# EAGLE board kitcop4 (EAGLE 6.1)
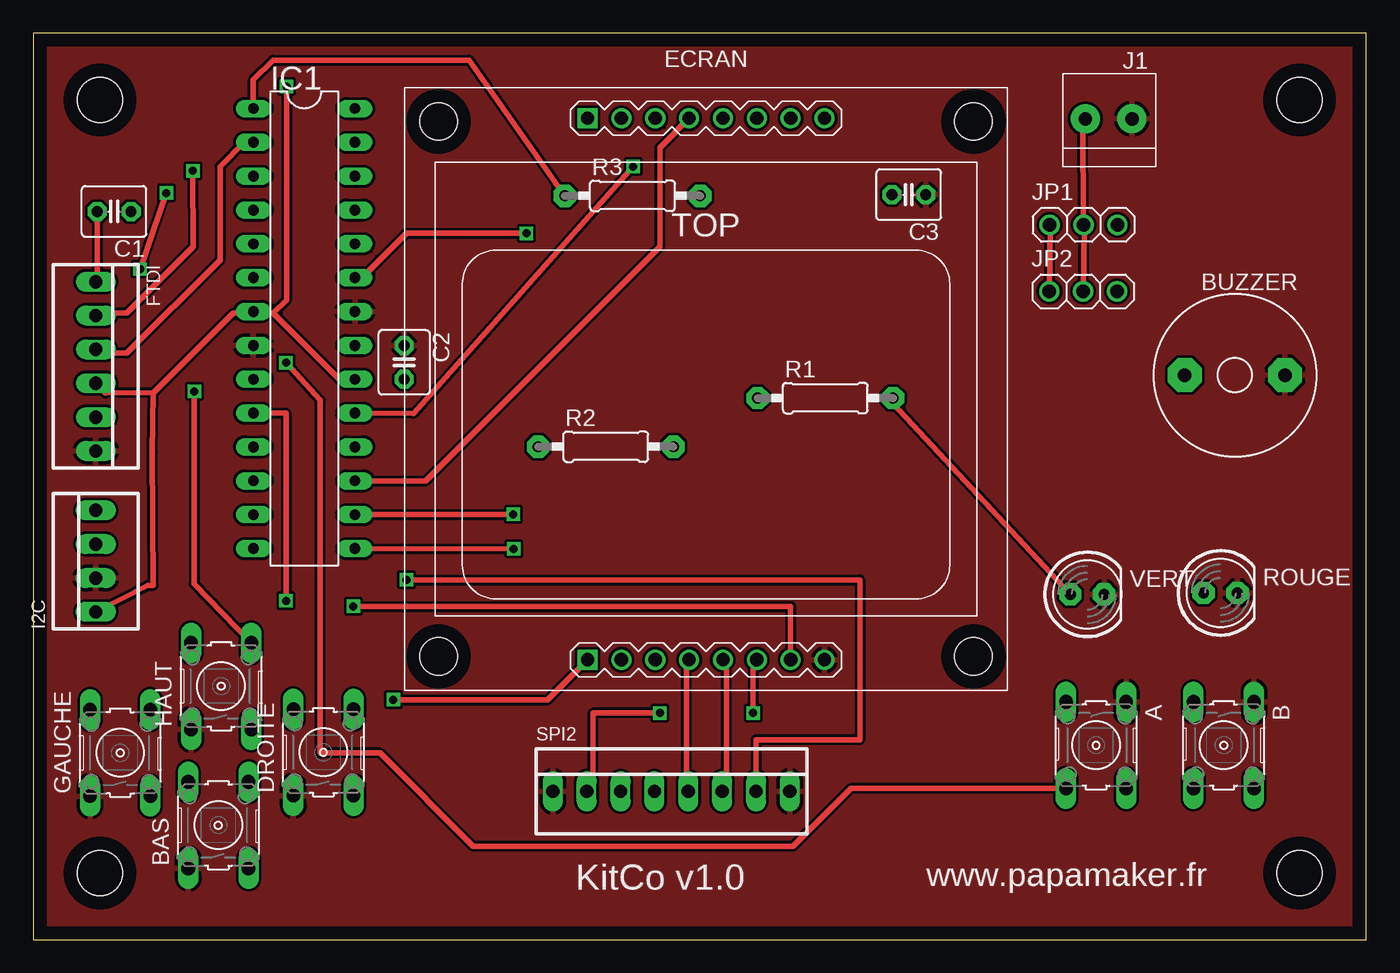
[diagram p0: board, top side]
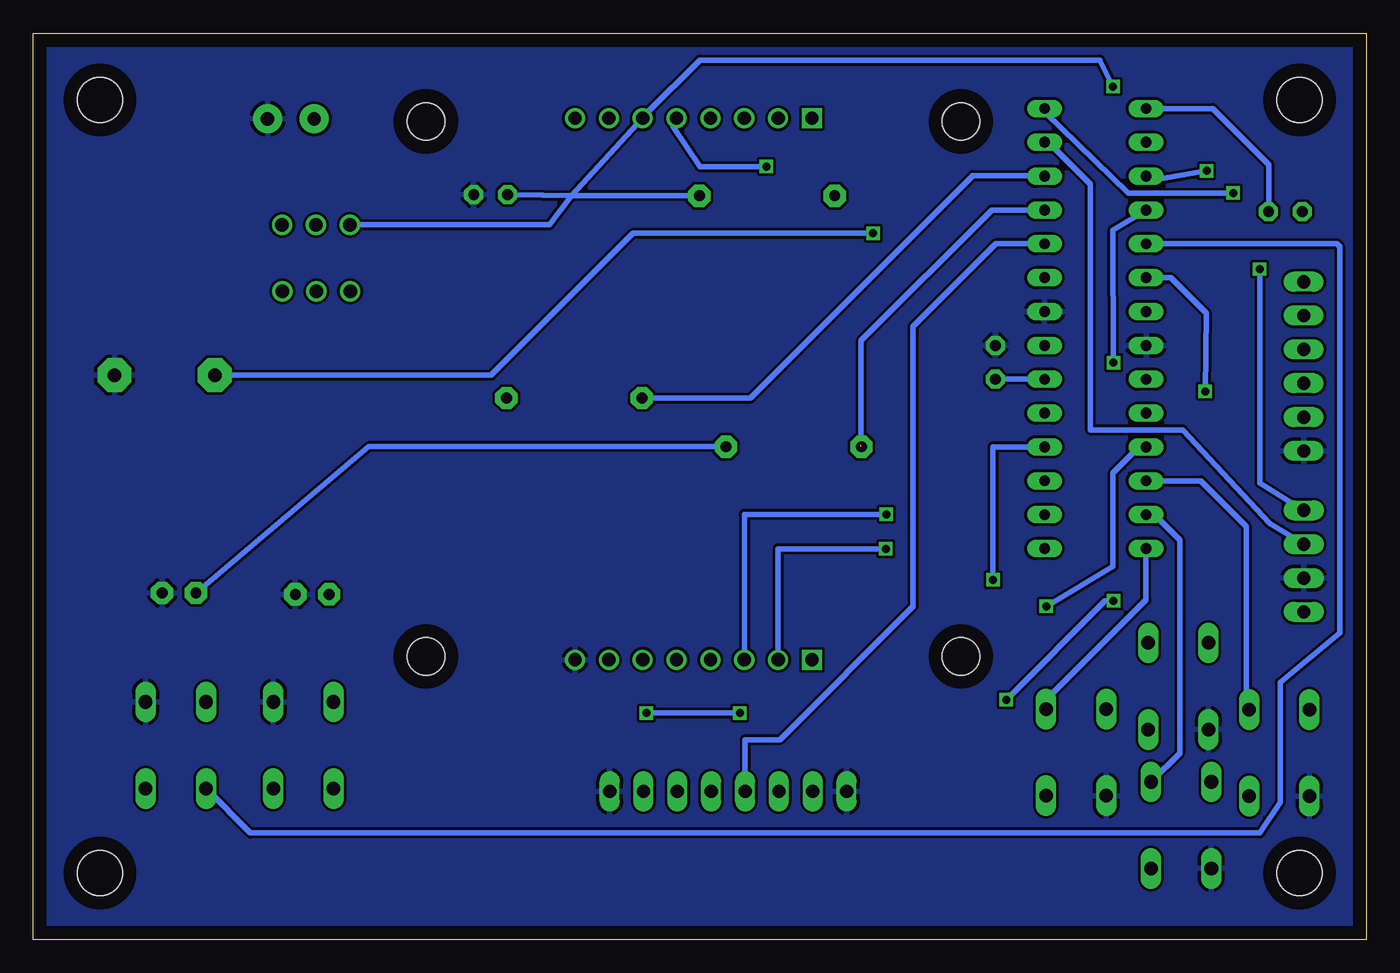
[diagram p1: board, bottom side, seen from below]

Size 100 x 68 mm. Coordinates in mm from the lower left corner, seen from the top.
Outline: 0,0 100,0 100,68 0,68 0,0
Copper layers (1*16): Top 0.035mm / dielectric 1.5mm / Bottom 0.035mm
Design rules: minimum track width 10mil, minimum drill 24mil, track to track 8mil, track to pad 8mil, pad to pad 8mil, via to via 8mil, smd to smd 8mil, copper to edge 40mil, drill to drill 8mil, minimum pad ring 10mil, minimum via ring 8mil, stop-mask expansion 4mil, vias tented up to drill 0mil, thermal gap 10mil
Holes 3.4 mm at 95,63 95,5 5,5 5,63

## Footprints (pad centres in the part's own frame; a part is rotated, then mirrored left to right if it is on the bottom)
B3F-10XX = drill 1.016 long: 1 -3.251,2.261; 2 3.251,2.261; 3 -3.251,-2.261; 4 3.251,-2.261
AL60P = drill 1.016 pad 2.54 octagon: 1 -3.759,0; 2 3.759,0
C025-040X050 = drill 0.813 pad 1.422 octagon: 1 -1.27,0; 2 1.27,0
DISPLAY-NOKIA-3310 = drill 1 square: J1.1 -8.89,-20.32; J2.1 -8.89,20.32 | drill 1: J1.2 -6.35,-20.32; J1.3 -3.81,-20.32; J1.4 -1.27,-20.32; J1.5 1.27,-20.32; J1.6 3.81,-20.32; J1.7 6.35,-20.32; J1.8 8.89,-20.32; J2.2 -6.35,20.32; J2.3 -3.81,20.32; J2.4 -1.27,20.32; J2.5 1.27,20.32; J2.6 3.81,20.32; J2.7 6.35,20.32; J2.8 8.89,20.32 | hole 2.8: -20.066,-20.066; 20.066,-20.066; 20.066,20.066; -20.066,20.066
22-23-2061 = drill 1 long: 1 -6.35,0; 2 -3.81,0; 3 -1.27,0; 4 1.27,0; 5 3.81,0; 6 6.35,0
22-23-2041 = drill 1 long: 1 -3.81,0; 2 -1.27,0; 3 1.27,0; 4 3.81,0
DIL28-3 = drill 0.813 long: 1 -16.51,-3.81; 2 -13.97,-3.81; 3 -11.43,-3.81; 4 -8.89,-3.81; 5 -6.35,-3.81; 6 -3.81,-3.81; 7 -1.27,-3.81; 8 1.27,-3.81; 9 3.81,-3.81; 10 6.35,-3.81; 11 8.89,-3.81; 12 11.43,-3.81; 13 13.97,-3.81; 14 16.51,-3.81; 15 16.51,3.81; 16 13.97,3.81; 17 11.43,3.81; 18 8.89,3.81; 19 6.35,3.81; 20 3.81,3.81; 21 1.27,3.81; 22 -1.27,3.81; 23 -3.81,3.81; 24 -6.35,3.81; 25 -8.89,3.81; 26 -11.43,3.81; 27 -13.97,3.81; 28 -16.51,3.81
1X2-3.5MM = drill 1 pad 2.184: 1 1.8,0; 2 -1.7,0
1X03 = drill 1.016: 1 -2.54,0; 2 0,0; 3 2.54,0
0207/10 = drill 0.813 pad 1.676 octagon: 1 -5.08,0; 2 5.08,0
LED5MM = drill 0.813 pad 1.676 octagon: A -1.27,0; K 1.27,0
22-23-2081 = drill 1 long: 1 -8.89,0; 2 -6.35,0; 3 -3.81,0; 4 -1.27,0; 5 1.27,0; 6 3.81,0; 7 6.35,0; 8 8.89,0

## Placement (x,y rotation side)
A  [B3F-10XX]  79.74,14.58 270 top
B  [B3F-10XX]  89.31,14.58 270 top
BAS  [B3F-10XX]  13.88,8.58 90 top
BUZZER  [AL60P]  90.15,42.35 0 top
C1  [C025-040X050]  6.06,54.63 180 top
C2  [C025-040X050]  27.82,43.31 270 top
C3  [C025-040X050]  65.68,55.89 180 top
DROITE  [B3F-10XX]  21.76,14.05 90 top
ECRAN  [DISPLAY-NOKIA-3310]  50.47,41.31 0 top
FTDI  [22-23-2061]  4.69,43.01 270 top
GAUCHE  [B3F-10XX]  6.52,14.01 90 top
HAUT  [B3F-10XX]  14.09,19.01 90 top
I2C  [22-23-2041]  4.69,28.39 90 top
IC1  ATMEGA328P-PU  [DIL28-3]  20.32,45.85 270 top
J1  1X2-3.5MM  [1X2-3.5MM]  80.63,61.58 0 top
JP1  [1X03]  78.8,53.63 0 top
JP2  [1X03]  78.77,48.63 0 top
R1  [0207/10]  59.42,40.63 0 top
R2  [0207/10]  42.95,36.98 0 top
R3  [0207/10]  44.95,55.81 0 top
ROUGE  [LED5MM]  89.07,26.01 0 top
SPI2  [22-23-2081]  47.87,11.12 0 top
VERT  [LED5MM]  79.07,25.9 0 top

## Library data of the parts
A B BAS DROITE GAUCHE HAUT = switch-omron; MPN: B3F-1000; OC_FARNELL: 176432; OC_NEWARK: 36M3542
BUZZER C1-C3 IC1 J1 JP1 JP2 R1-R3 ROUGE VERT = adafruit
ECRAN = FJlib
FTDI = con-molex; MF: MOLEX; MPN: 22-23-2061; OC_FARNELL: 1462922; OC_NEWARK: 27C1933
I2C = con-molex; MF: MOLEX; MPN: 22-23-2041; OC_FARNELL: 1462920; OC_NEWARK: 38C0355
SPI2 = con-molex; MF: MOLEX; MPN: 22-23-2081; OC_FARNELL: 1756826; OC_NEWARK: 01C7592

## Nets
_CE.2: ECRAN.J2.2
_RST.2: ECRAN.J2.1
GND: A.1 B.1 BAS.1 BUZZER.2 C2.1 C3.1 DROITE.1 ECRAN.J1.8 FTDI.6 GAUCHE.1 HAUT.1 I2C.2 IC1.8 IC1.22 J1.1 ROUGE.K SPI2.1 SPI2.8 VERT.K
N$1: A.4 IC1.4
N$2: B.4 IC1.5
N$3: ECRAN.J1.7 IC1.11
N$4: GAUCHE.4 IC1.12
N$5: BAS.4 IC1.13
N$6: DROITE.4 IC1.14
N$7: I2C.3 IC1.27
N$8: I2C.4 IC1.28
N$9: J1.2 JP1.2 JP2.2
N$10: HAUT.4 IC1.6
N$11: FTDI.2 IC1.3
N$12: IC1.26 R1.1
N$13: R1.2 VERT.A
N$14: IC1.25 R2.1
N$15: R2.2 ROUGE.A
N$16: IC1.24 SPI2.4
N$17: ECRAN.J2.4 IC1.17
N$18: ECRAN.J2.5 IC1.19
N$19: ECRAN.J1.2 IC1.15
N$20: ECRAN.J1.3 IC1.16
N$21: FTDI.3 IC1.2
N$22: IC1.18 SPI2.7
N$23: BUZZER.1 IC1.23
N$24: ECRAN.J1.4 SPI2.5
N$25: C1.2 FTDI.1
N$26: ECRAN.J1.5 SPI2.6
N$27: ECRAN.J1.6 SPI2.2
N$29: C1.1 IC1.1 R3.1
N$30: ECRAN.J1.1 IC1.10
VCC: C2.2 C3.2 ECRAN.J2.6 FTDI.4 I2C.1 IC1.7 IC1.20 JP1.1 JP2.1 R3.2

## Tracks (layer width: path | path; a pad name or v marks a point on that pad's centre or on a via)
GND
  pour Bottom: -2,-2 -2,69 101,69 101,-2
  pour Top: -2,-2 -2,69 101,69 101,-2
N$1  (via drill 0.6)
  Top 0.406: A.4 61.33,11.33 57,7 33,7 26,14 21.54,14 21.54,40.46 v18.95,43.28
  Bottom 0.406: v18.95,43.28 19,53.25 IC1.4
N$2
  Bottom 0.406: IC1.5 2.2,52.2 2,52 2,23 6.45,19.28 6.45,10.28 8,8 83.72,8 B.4
N$3  (via drill 0.6)
  Top 0.406: v24,25 56.82,25 ECRAN.J1.7
  Bottom 0.406: IC1.11 17.04,36.96 19,35 19,28 v24,25
N$4
  Bottom 0.406: IC1.12 12.42,34.42 9,31 9,17.48 GAUCHE.4
N$5
  Bottom 0.406: IC1.13 15.88,31.88 14,30 14,13.97 BAS.4
N$6
  Bottom 0.406: DROITE.4 24.21,17.78 16.53,25.46 16.53,29.32 IC1.14
N$7
  Bottom 0.406: I2C.3 7.22,31.23 13.76,38.25 20.68,38.25 20.68,56.67 24,60 IC1.27
N$8  (via drill 0.6)
  Top 0.406: v8,50.31 v9.98,56.02
  Bottom 0.406: IC1.28 24.13,62.13 17.85,56 v9.98,56.02 | v8,50.31 7.98,34.26 I2C.4
N$9
  Top 0.406: JP2.2 78.85,53.52 JP1.2 78.74,61.39 J1.2
N$10  (via drill 0.6)
  Top 0.406: v12.08,41.13 12.06,26.7 HAUT.4
  Bottom 0.406: IC1.6 14.66,49.66 12,47 v12.08,41.13
N$11  (via drill 0.6)
  Top 0.406: v11.97,57.68 12,52 7,47 6,47 FTDI.2
  Bottom 0.406: v11.97,57.68 16,57 IC1.3
N$12
  Bottom 0.406: R1.1 46.21,40.63 29.51,57.33 24.18,57.33 IC1.26
N$13
  Top 0.406: R1.2 64.5,40.2 VERT.A
N$14  (1 unrouted)
  Bottom 0.406: IC1.25 28.09,54.74 37.89,44.93 37.89,37 R2.1 | 37.89,37.11 38,37
N$15
  Bottom 0.406: R2.2 74.83,36.98 ROUGE.A
N$16
  Bottom 0.406: IC1.24 27.8,52.2 34,46 34,25 44,15 46.6,15 SPI2.4
N$17
  Top 0.406: IC1.17 29.42,34.42 47,52 47,59.43 ECRAN.J2.4
N$18  (via drill 0.6)
  Top 0.406: v45,58 28.52,39.48 IC1.19
  Bottom 0.406: v45,58 50,58 52,61 ECRAN.J2.5
N$19  (via drill 0.6)
  Top 0.406: IC1.15 v36.04,29.32
  Bottom 0.406: v36.04,29.32 44.12,29.32 ECRAN.J1.2
N$20  (via drill 0.6)
  Top 0.406: IC1.16 v36,31.91
  Bottom 0.406: v36,31.91 46.66,31.91 ECRAN.J1.3
N$21
  Top 0.406: IC1.2 15.82,59.82 14,58 14,51 7,44 4.97,44 FTDI.3
N$22  (via drill 0.6)
  Top 0.406: v28,27 62,27 62,15 54.22,15 SPI2.7
  Bottom 0.406: IC1.18 28,36.96 v28,27
N$23  (via drill 0.6)
  Top 0.406: IC1.23 24.66,49.66 28,53 v37,53
  Bottom 0.406: BUZZER.1 65.65,42.35 55,53 v37,53
N$24
  Top 0.406: ECRAN.J1.4 49,21 49,12 SPI2.5
N$25
  Top 0.406: C1.2 4.79,49.46 FTDI.1
N$26
  Top 0.406: ECRAN.J1.5 52,21 52,12 SPI2.6
N$27  (via drill 0.6)
  Top 0.406: SPI2.2 42,12 42,17 v47,17 | v54,17 54,21 ECRAN.J1.6
  Bottom 0.406: v54,17 v47,17
N$29
  Top 0.406: IC1.1 16.51,64.51 18,66 32.68,66 R3.1
  Bottom 0.406: IC1.1 11.52,62.36 7.3,58.15 7.3,54.66 C1.1
N$30  (via drill 0.6)
  Top 0.406: IC1.10 18.96,39.5 v18.96,25.41 | v27,18 38.59,18 ECRAN.J1.1
  Bottom 0.406: v18.96,25.41 19.59,25.41 v27,18
VCC  (via drill 0.6)
  Top 0.406: 9.04,41.05 15,47 16,47 IC1.7 17,47 18,47 | 9.04,41.05 9.01,41.03 8.93,36.58 9.01,26.58 8.58,26.58 I2C.1 | 18,47 23,42 24,42 IC1.20 | 18,47 19,48 v19,64 | JP2.1 76.31,53.52 JP1.1 | 9.04,41.05 5.43,41 FTDI.4
  Bottom 0.406: v19,64 20,66 50,66 54,62 ECRAN.J2.6 59.63,55.82 | JP1.1 61.28,53.63 59.63,55.82 | R3.2 59.63,55.82 | IC1.20 C2.2 | C3.2 61.74,55.85 59.63,55.82

## Text on the board
tNames: KitCo v1.0 | www.papamaker.fr